# Altium PCB 3043-1-1532_Rev01.PcbDoc (part 1 of 2)
Units mm, origin at the board's own origin, x right, y up, seen from the top; angles counter-clockwise.
Board outline 98 x 98 mm, 4 copper layers (Top Layer, MidLayer1, MidLayer2, Bottom Layer); 167 components, 124 nets, 549 pads, 217 vias.
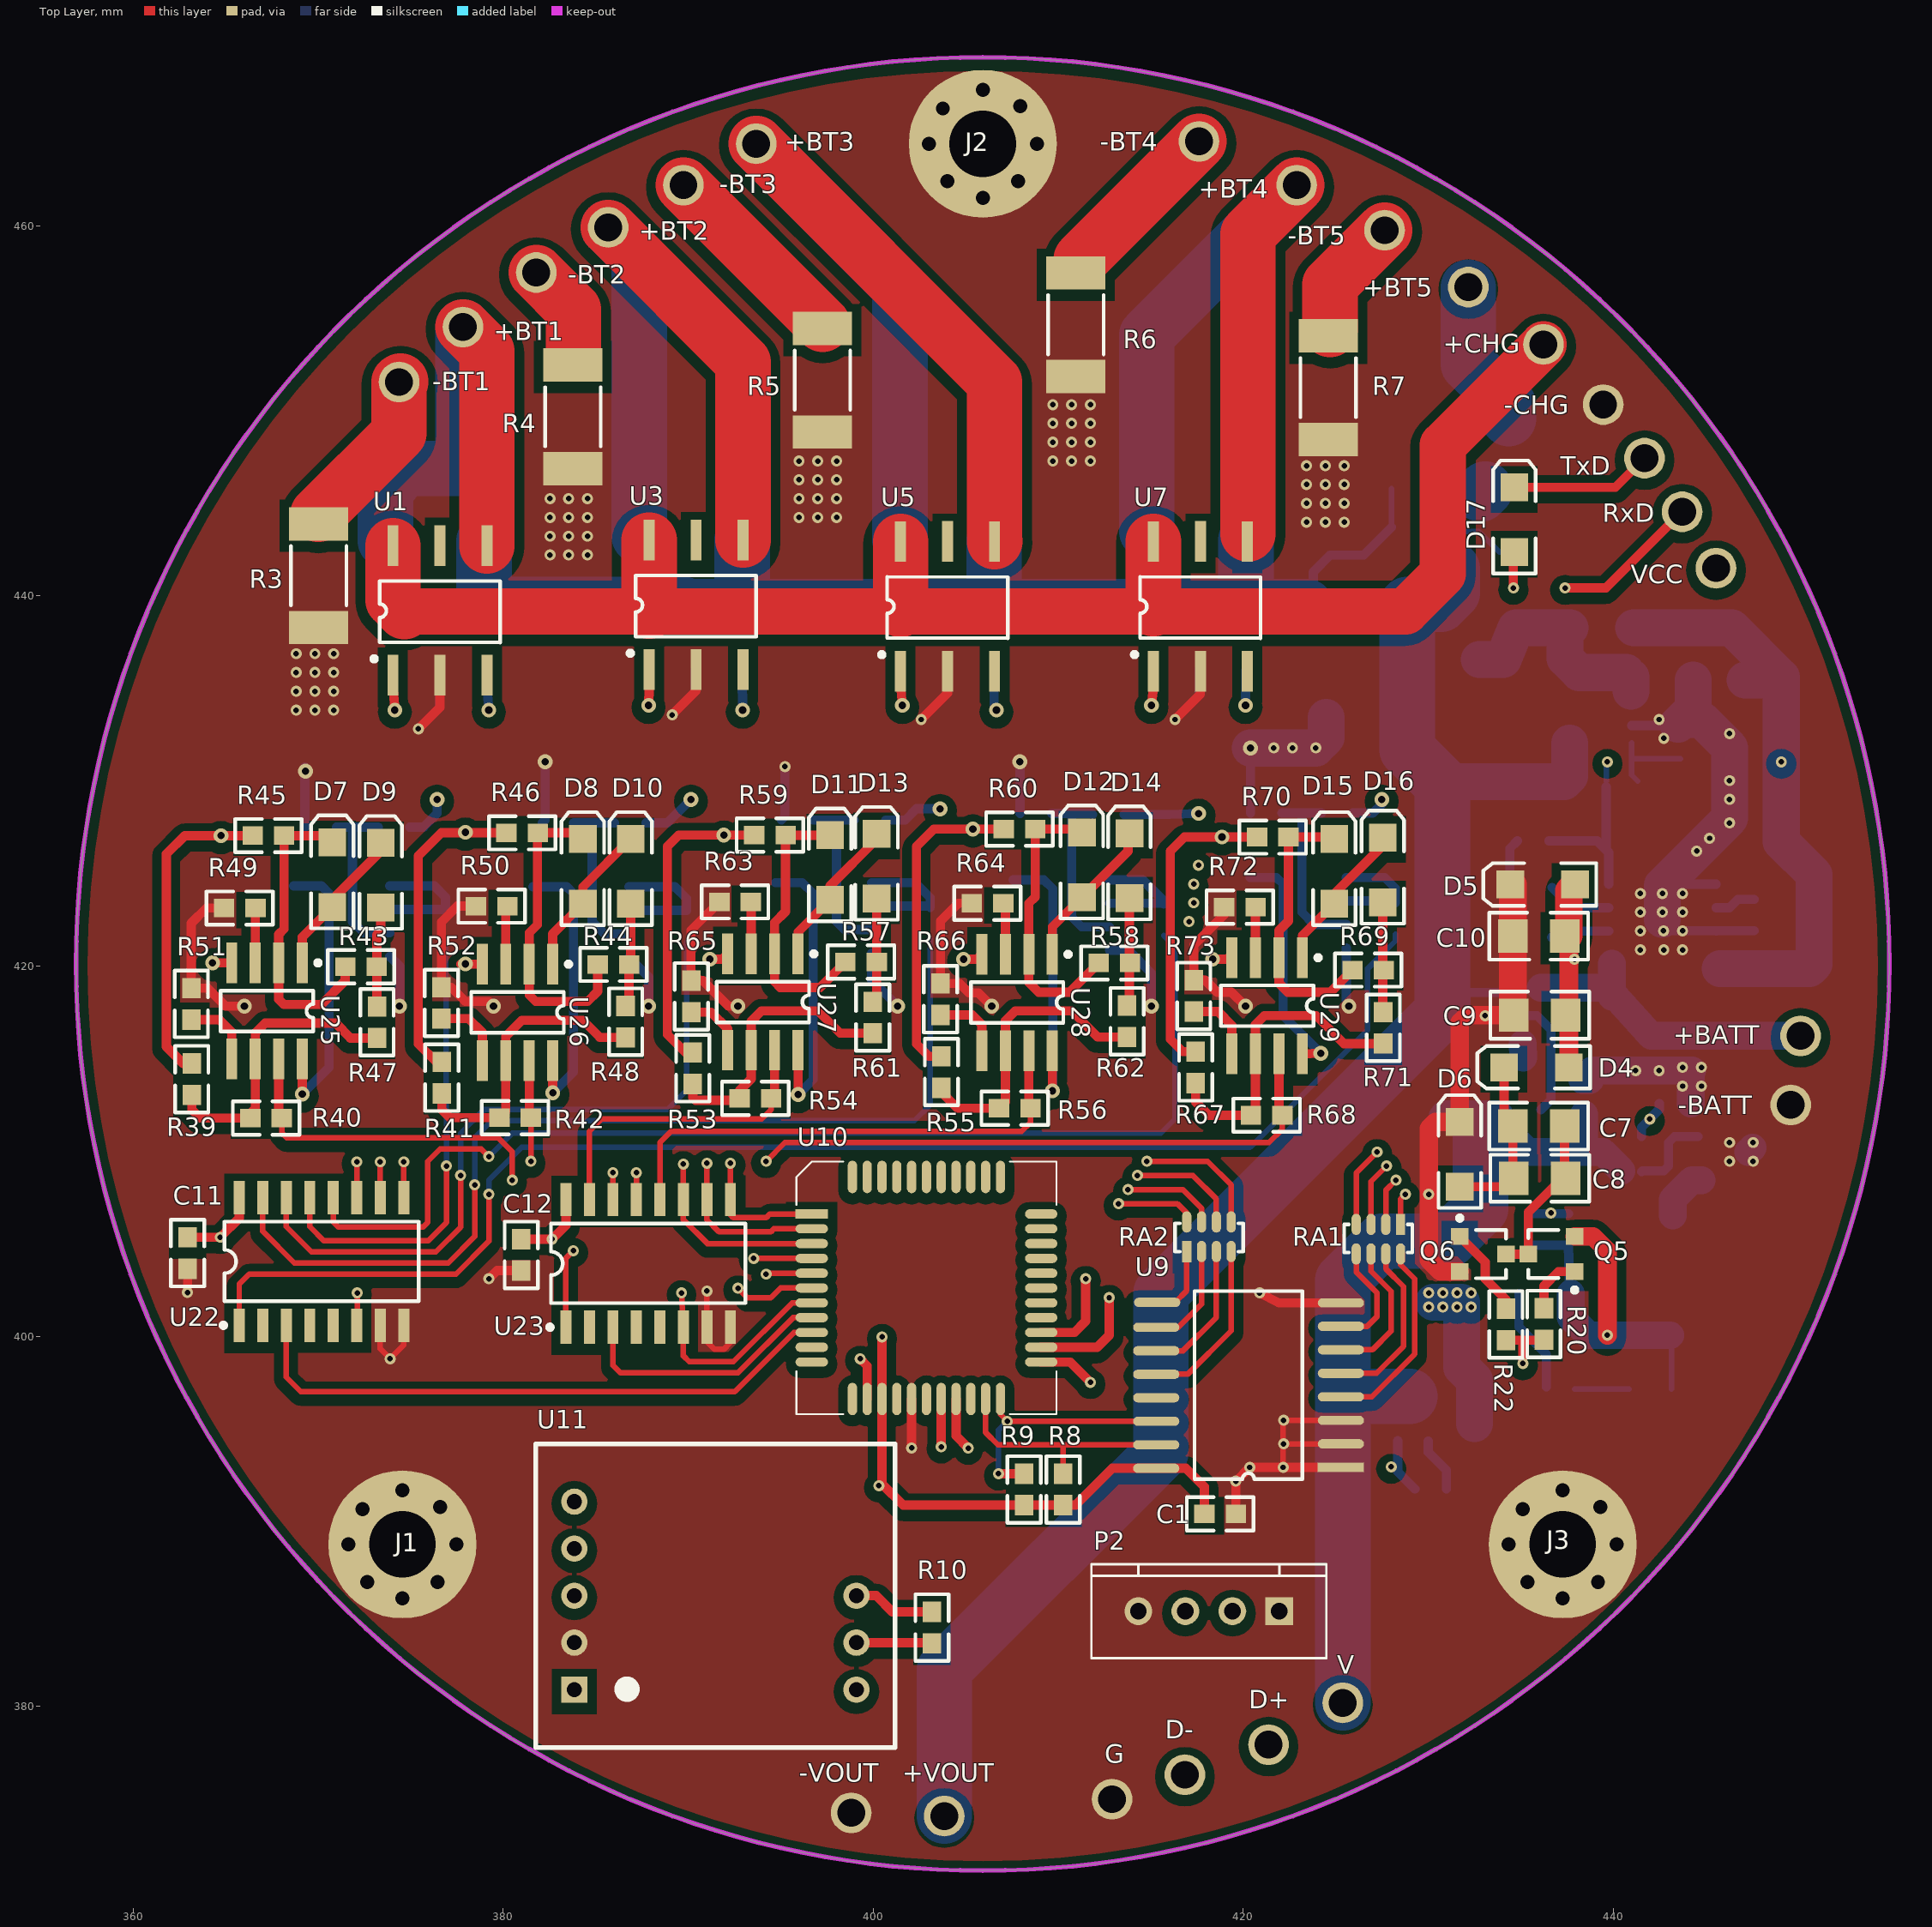
[diagram p0: Top Layer view]
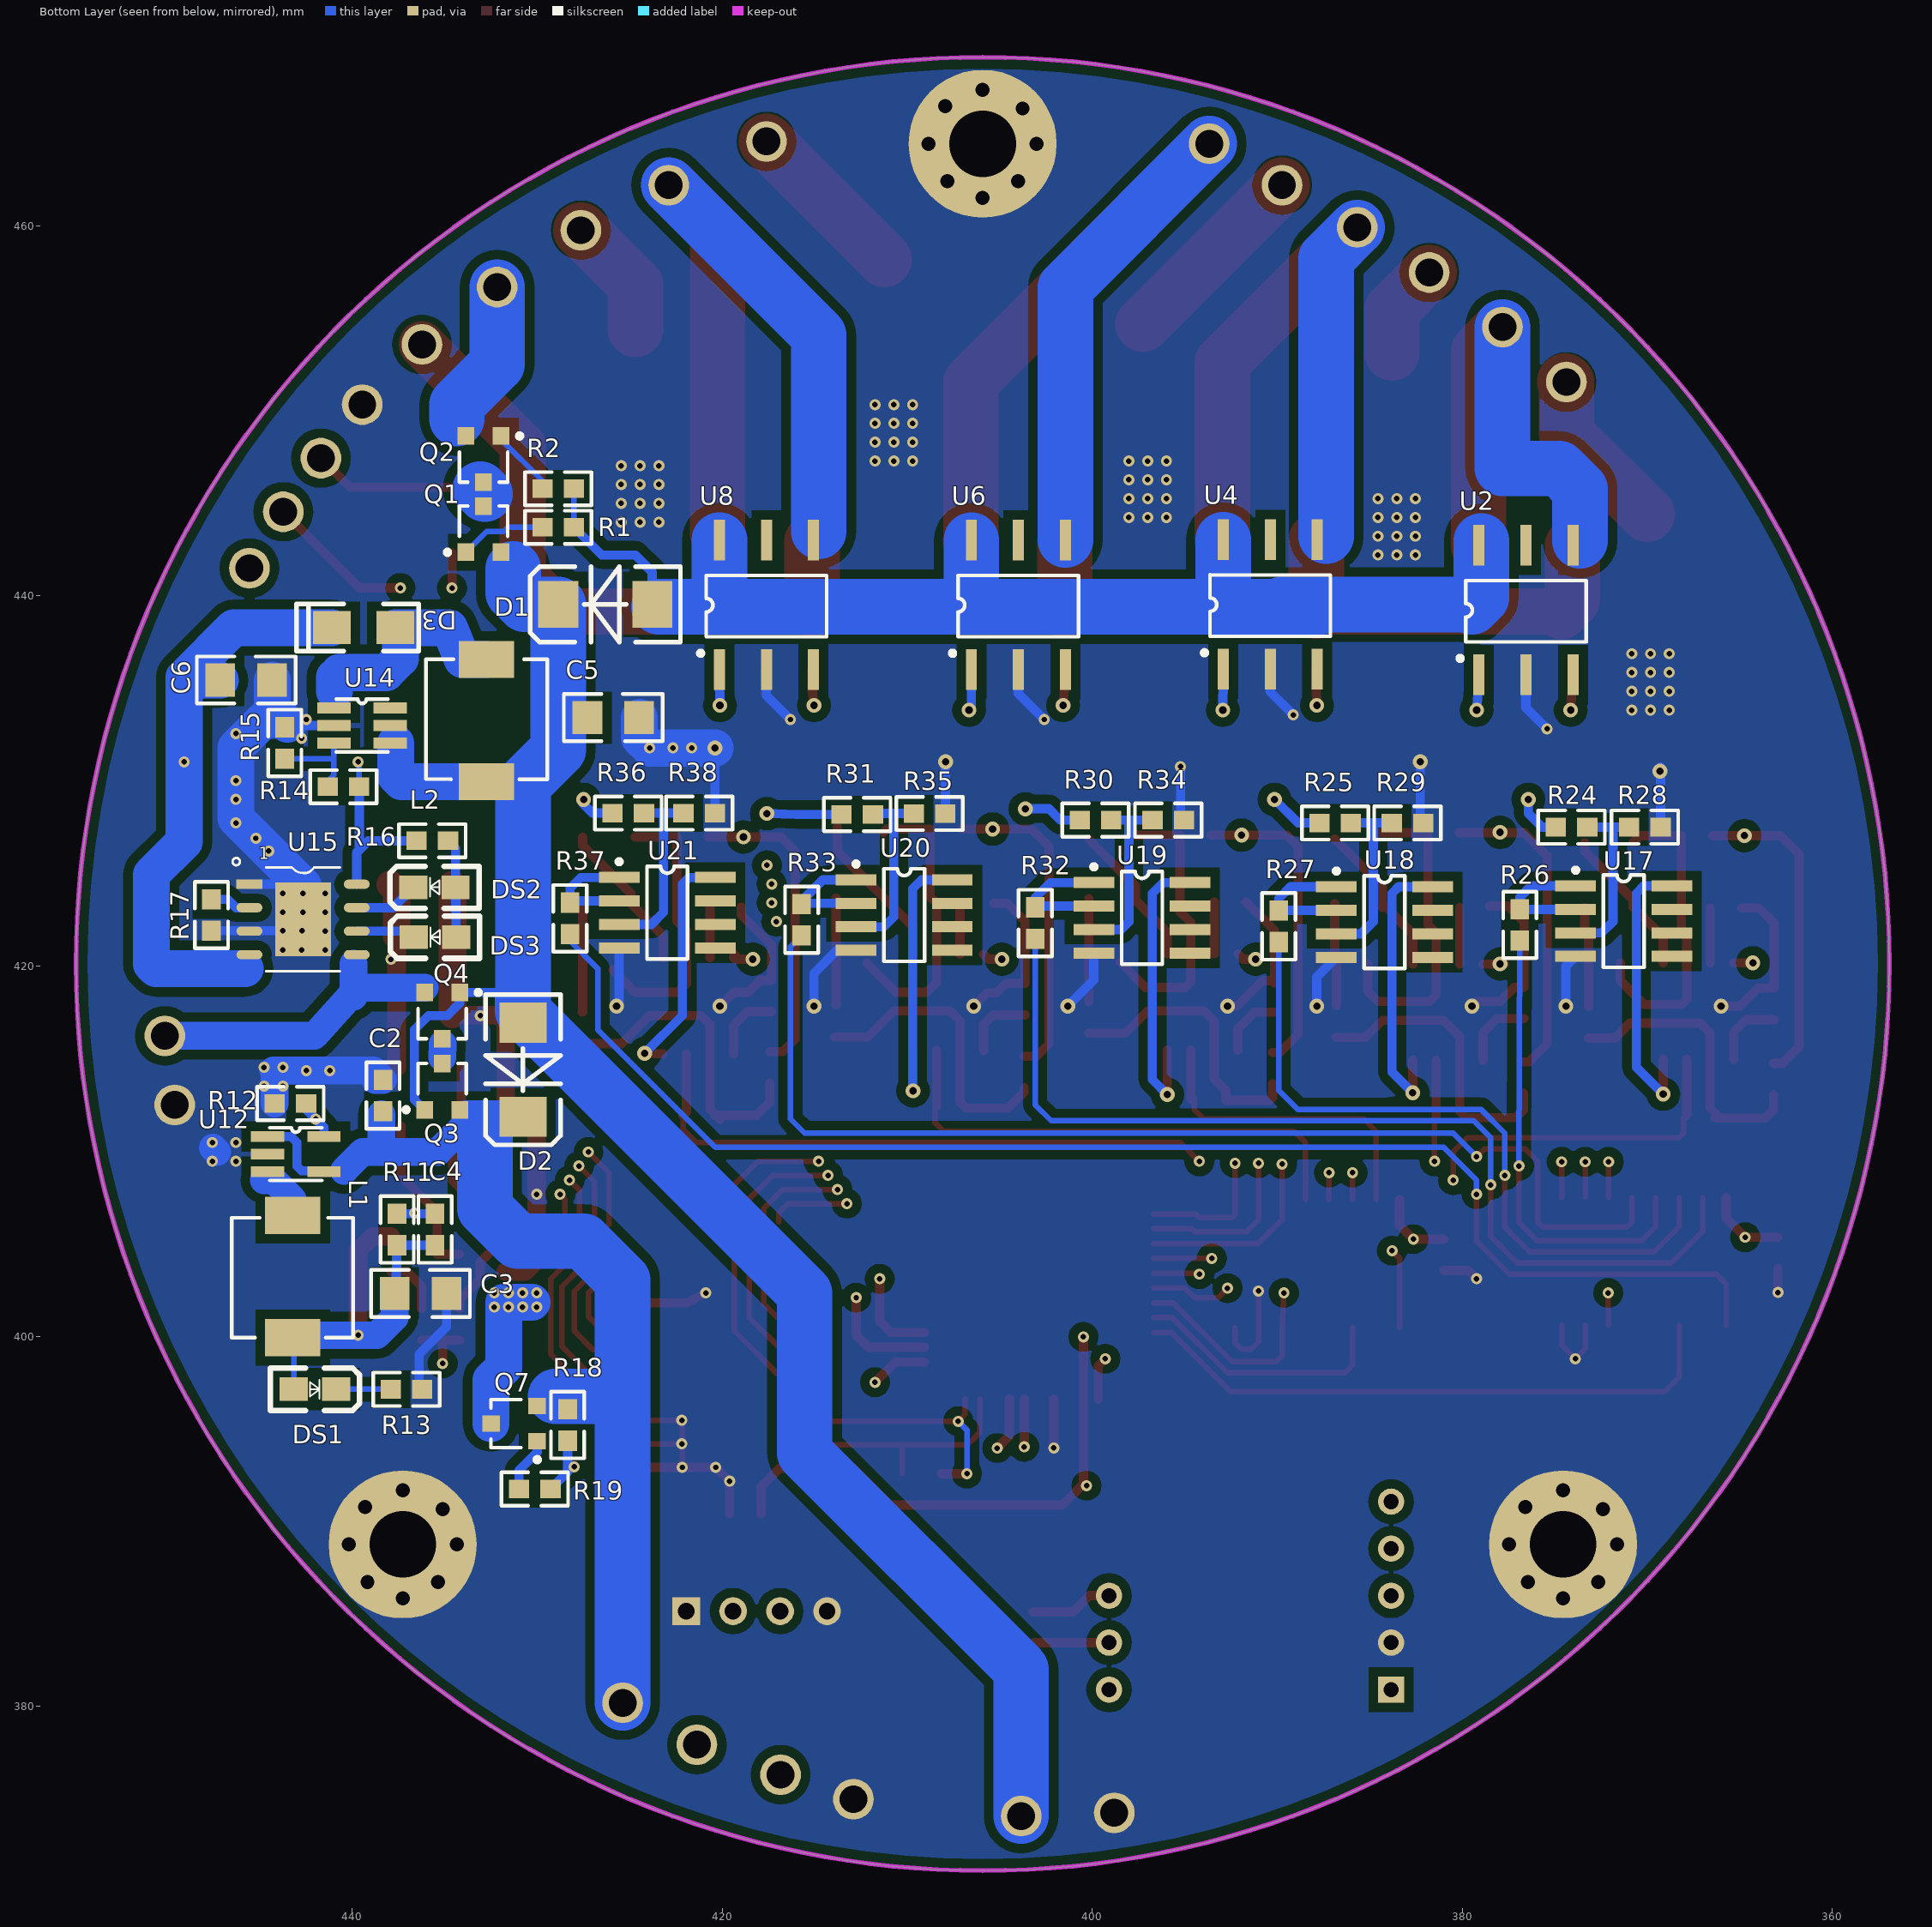
[diagram p1: Bottom Layer view, seen from below]
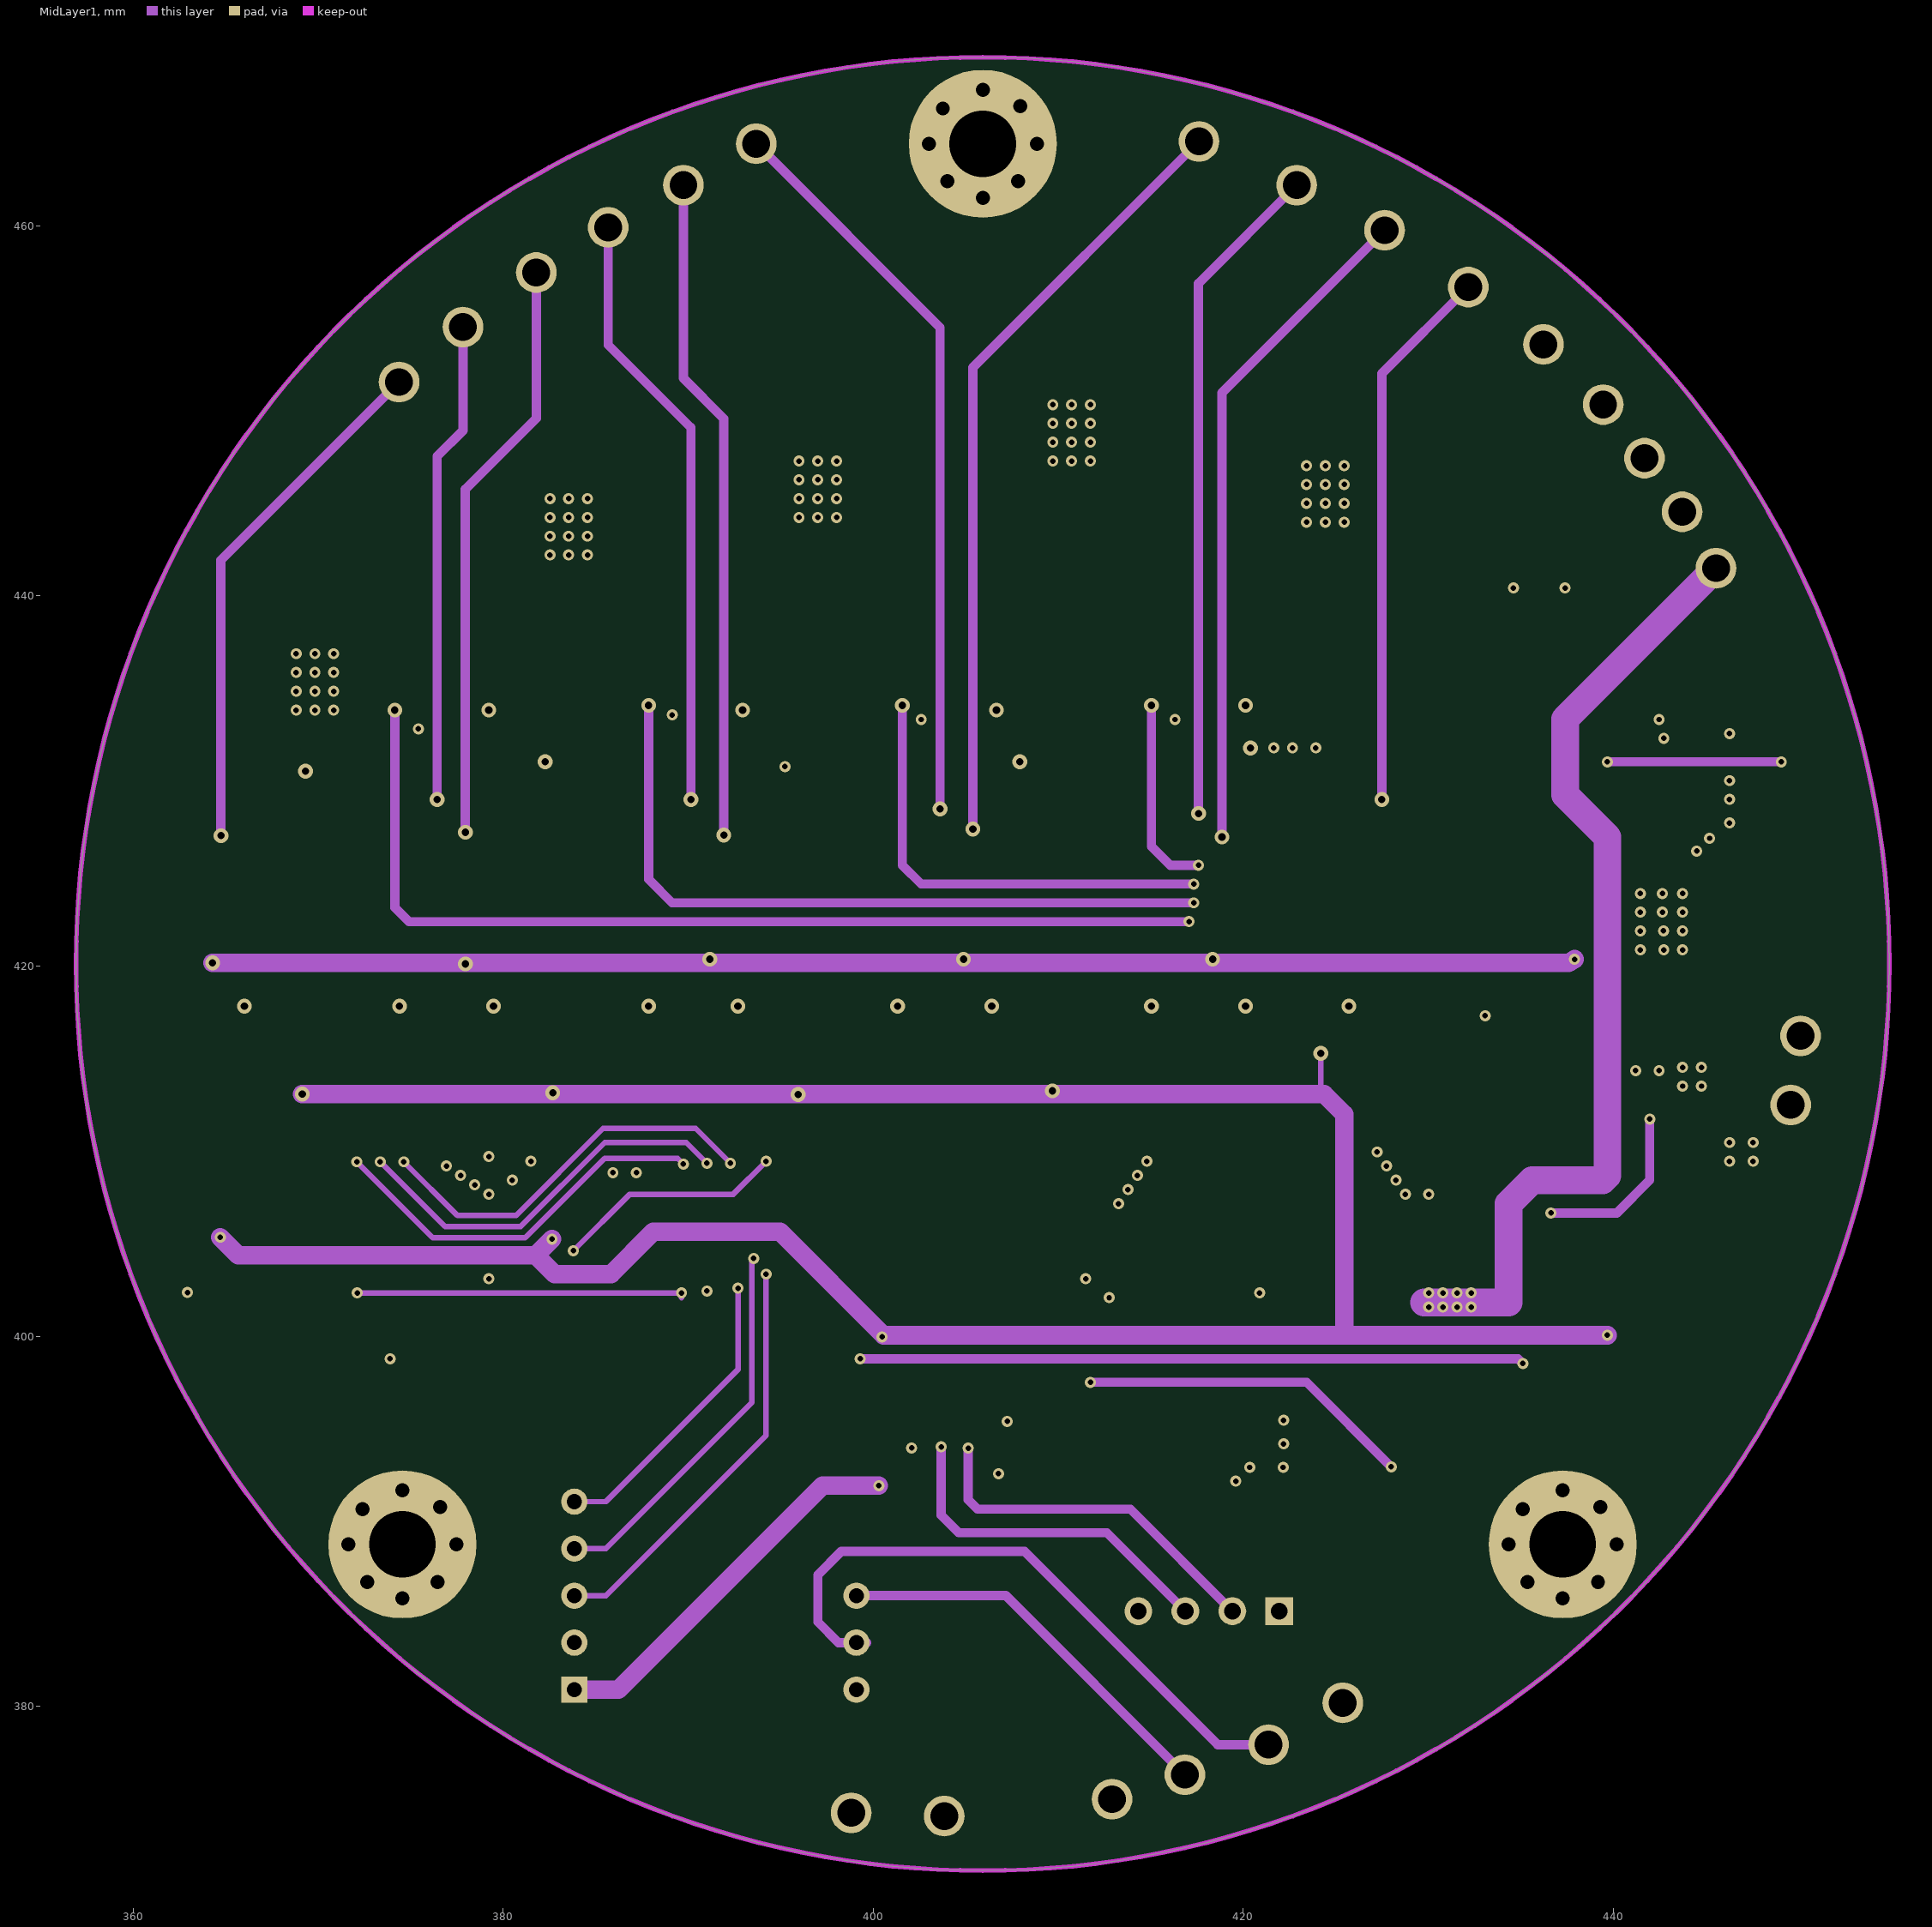
[diagram p2: MidLayer1]
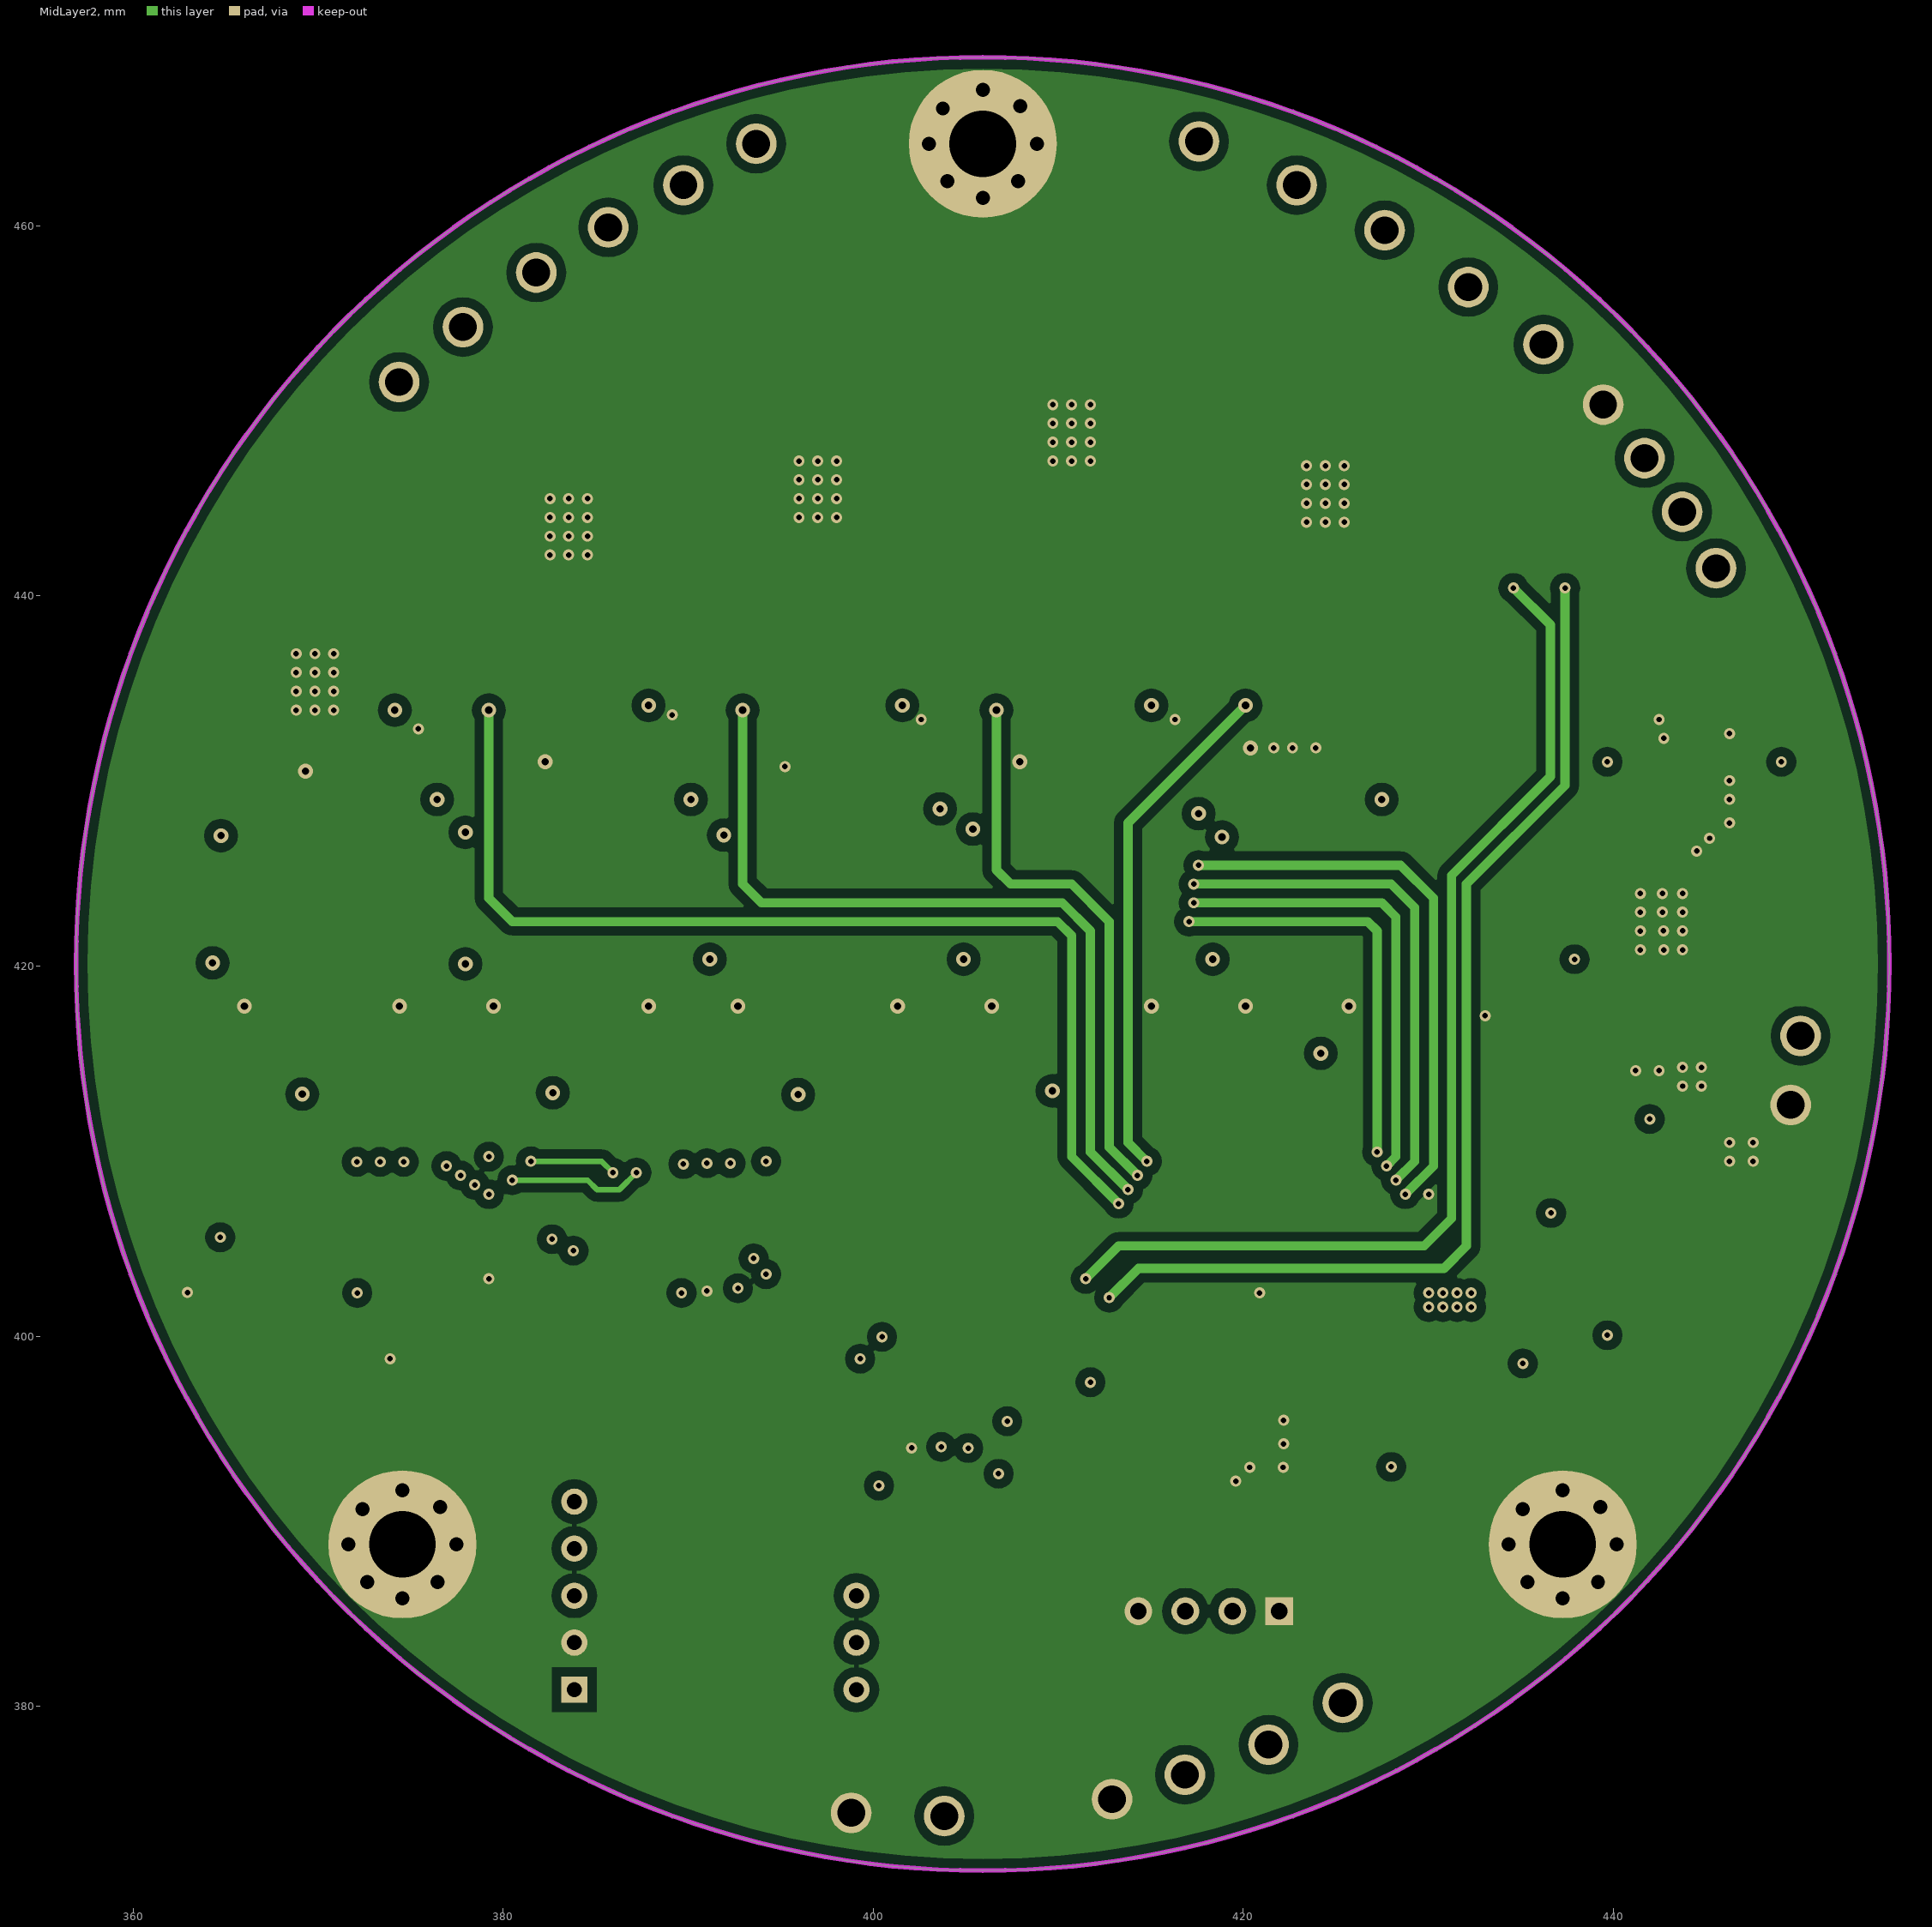
[diagram p3: MidLayer2]

## Layer stack, top to bottom
Top Layer: signal copper 0.0356
Dielectric: core 0.32, FR-4, Dk 4.8
MidLayer1: signal copper 0.0356
Dielectric: prepreg 0.32, FR-4, Dk 4.8
MidLayer2: signal copper 0.0356
Dielectric: core 0.32, FR-4, Dk 4.8
Bottom Layer: signal copper 0.0356

## Board outline
405.914,371.116 cw(c405.914,420.116) 356.914,420.116 cw(c405.914,420.116) 405.914,469.116 cw(c405.914,420.116) 454.914,420.116 cw(c405.914,420.116)

## Design rules (kind name [scope] priority, off if disabled: settings)
Clearance [All] p1: gap=0.3
ComponentClearance [All] p1: gap=0 collisioncheckmode=2
HoleSize [All] p1: absolutevalues=TRUE maxlimit=10 minlimit=0.025 maxpercent=80.000 minpercent=20.000
PolygonConnect [All] p1: connectstyle=Direct reliefconductorwidth=0.254 reliefentries=4 polygonreliefangle="90 Angle"
RoutingLayers [All] p1: top layer_v5=TRUE mid layer 1_v5=FALSE mid layer 2_v5=FALSE bottom layer_v5=TRUE
RoutingVias [All] p1: holewidth=0.711 width=1.27 viastyle="Through Hole" minholewidth=0.711 minwidth=1.27 maxholewidth=0.711 maxwidth=1.27
SolderMaskExpansion [All] p1: expansion=0.102
TestPointUsage [All] p1: valid=0 allowmultiple=FALSE
Testpoint [All] p1: side=15 testpointundercomponent=TRUE minsize=1.016 maxsize=2.54 preferedsize=1.524 minholesize=0 maxholesize=1.016 preferedholesize=0.813 testpointgrid=0.025 style=1023 order=-539222988
Width [All] p1: maxlimit=10 minlimit=0.1 preferedwidth=0.254 toplayer_prefwidth=0.5 midlayer1_prefwidth=1.5 midlayer2_prefwidth=0.5 bottomlayer_prefwidth=3 minimp=50.000000 maximp=50.000000 favimp=50.000000
15 further rules are at their usual default settings.

## Classes and differential pairs
component class U_5-PWR_ADC3: C11 C12 U22 U23
component class U_5-PWR_ADC2: R24 R25 R26 R27 R28 R29 R30 R31 R32 R33 R34 R35 R36 R37 R38 U17 U18 U19 U20 U21
component class U_5-PWR_ADC: D7 D8 D9 D10 D11 D12 D13 D14 D15 D16 R39 R40 R41 R42 R43 R44 R45 R46 R47 R48 R49 R50 R51 R52 R53 R54 R55 R56 R57 R58 R59 R60 R61 R62 R63 R64 R65 R66 R67 R68 R69 R70 R71 R72 R73 U25 U26 U27 U28 U29
component class U_2-PWR_MANAGE: +BT1 +BT2 +BT3 +BT4 +BT5 +CHG -BT1 -BT2 -BT3 -BT4 -BT5 -CHG C1 CN1 CN2 D1 DP1 Q1 Q2 R1 R2 R3 R4 R5 R6 R7 R8 R9 RA1 RA2 U1 U2 U3 U4 U5 U6 U7 U8 U9
component class U_4-PWR_MANAGE_3: +VOUT -VOUT C38 D17 D+ D- G J1 J2 J3 P2 Q7 R10 R18 R19 RxD TxD U10 U11 V VCC
component class U_3-PWR_BAK_BATT: +BATT -BATT C2 C3 C4 C5 C6 C7 C8 C9 C10 D2 D3 D4 D5 D6 DS1 DS2 DS3 L1 L2 Q3 Q4 Q5 Q6 R11 R12 R13 R14 R15 R16 R17 R20 R22 U12 U14 U15

## Components (designator, comment, footprint, x,y, rotation, side; value= is the part's Value field where it differs from the comment)
+BATT "ND" END_1.5_2.2 450.113,416.23 r90 top
+BT1 "ND" END_1.5_2.2 377.825,454.533 r90 top
+BT2 "ND" END_1.5_2.2 385.674,459.918 r90 top
+BT3 "ND" END_1.5_2.2 393.675,464.439 r90 top
+BT4 "ND" END_1.5_2.2 422.885,462.204 r90 top
+BT5 "ND" END_1.5_2.2 432.156,456.692 r90 top
+CHG "ND" END_1.5_2.2 436.22,453.593 r90 top
+VOUT "ND" END_1.5_2.2 403.835,374.066 r90 top
-BATT "ND" END_1.5_2.2 449.58,412.496 r90 top
-BT1 "ND" END_1.5_2.2 374.371,451.561 r90 top
-BT2 "ND" END_1.5_2.2 381.787,457.479 r90 top
-BT3 "ND" END_1.5_2.2 389.738,462.204 r90 top
-BT4 "ND" END_1.5_2.2 417.601,464.566 r90 top
-BT5 "ND" END_1.5_2.2 427.634,459.765 r90 top
-CHG "ND" END_1.5_2.2 439.445,450.342 r90 top
-VOUT "ND" END_1.5_2.2 398.805,374.244 r90 top
C1 "100nF_20%_0603" C1608-0603 418.744,390.398 r0 top
C2 "4.7uF_20%_0603" C1608-0603 438.328,413.004 r90 bottom
C3 "10uF_20%_1206" CC3216-1206 435.153,402.311 r180 bottom
C4 "100nF_20%_0603" C1608-0603 435.508,405.765 r90 bottom
C5 "10uF_20%_1206" CC3216-1206 424.739,433.426 r180 bottom
C6 "10uF_20%_1206" CC3216-1206 444.576,435.458 r180 bottom
C7 "10uF_20%_1206" CC3216-1206 434.873,408.534 r180 top
C8 "10uF_20%_1206" CC3216-1206 434.823,411.353 r180 top
C9 "10uF_20%_1206" CC3216-1206 434.873,417.347 r180 top
C10 "10uF_20%_1206" CC3216-1206 434.823,421.615 r180 top
C11 "100nF_20%_0603" C1608-0603 362.941,404.495 r270 top
C12 "100nF_20%_0603" C1608-0603 380.975,404.393 r270 top
D1 "D Schottky" DO-214AA_785X100_200X160A100L_P 423.85,440.385 r0 bottom
D2 "D Schottky" DO-214AA_785X100_200X160A100L_P 431.597,416.865 r270 bottom
D3 "D Schottky" DO-M7 441.122,438.277 r90 bottom
D4 "1N4148" DSO-F2/D6.1 435.839,414.528 r180 top
D5 "SMAJ5.1V" DSO-F2/D6.1 436.169,424.409 r180 top
D6 "1N4148" DSO-F2/D6.1 431.698,409.829 r90 top
D7 "1N4148" DSO-F2/D6.1 370.764,424.939 r90 top
D8 "1N4148" DSO-F2/D6.1 384.302,425.12 r90 top
D9 "1N4148" DSO-F2/D6.1 373.38,424.914 r90 top
D10 "1N4148" DSO-F2/D6.1 386.893,425.12 r90 top
D11 "1N4148" DSO-F2/D6.1 397.662,425.323 r90 top
D12 "1N4148" DSO-F2/D6.1 411.277,425.475 r90 top
D13 "1N4148" DSO-F2/D6.1 400.177,425.399 r90 top
D14 "1N4148" DSO-F2/D6.1 413.842,425.425 r90 top
D15 "1N4148" DSO-F2/D6.1 424.917,425.12 r90 top
D16 "1N4148" DSO-F2/D6.1 427.533,425.196 r90 top
D17 "1N4148" DSO-F2/D6.1 434.645,444.119 r90 top
D+ "ND" END_1.5_2.2 421.361,377.927 r0 top
D- "ND" END_1.5_2.2 416.839,376.301 r0 top
DS1 "LED" LED0805 441.884,397.129 r0 bottom
DS2 "LED" LED0805 435.661,424.256 r180 bottom
DS3 "LED" LED0805 435.635,421.564 r180 bottom
G "ND" END_1.5_2.2 412.902,374.98 r90 top
J1 "COAX-F" PAD_GND 376.961,386.08 r0 top
J2 "COAX-F" PAD_GND 408.33,461.772 r0 top
J3 "COAX-F" PAD_GND 439.674,386.08 r0 top
L1 "Inductor" L6x6x3_3A 444.475,403.987 r270 bottom
L2 "Inductor" L6x6x3_3A 431.47,432.511 r90 bottom
P2 "Header 4" XH-04H 421.945,385.14 r180 top
Q1 "MOSFET-P  SI3401" SO-G3/C2.5 432.841,444.525 r180 bottom
Q2 "MOSFET-P  SI3401" SO-G3/C2.5 432.943,446.481 r0 bottom
Q3 "MOSFET-P  SI2301" SO-G3/C2.5 435.077,414.401 r180 bottom
Q4 "MOSFET-P  SI2301" SO-G3/C2.5 435.178,416.408 r0 bottom
Q5 "SS8550" SO-G3/C2.5 435.737,404.495 r90 top
Q6 "J3Y_SS8050 SMD0805" SO-G3/C2.5 433.857,404.381 r270 top
Q7 "MOSFET-P  SI2301" SO-G3/C2.5 432.156,395.326 r90 bottom
R1 "Res3" C1608-0603 428.854,443.713 r180 bottom
R2 "Res3" C1608-0603 428.854,445.795 r180 bottom
R3 "25mR_1%_3225" CR6332-2512 370.027,441.096 r270 top
R4 "25mR_1%_3225" CR6332-2512 383.769,449.682 r270 top
R5 "25mR_1%_3225" CR6332-2512 397.256,451.663 r270 top
R6 "25mR_1%_3225" CR6332-2512 410.947,454.66 r270 top
R7 "25mR_1%_3225" CR6332-2512 424.586,451.256 r270 top
R8 "4.7K_5%_0603" C1608-0603 410.261,391.719 r90 top
R9 "4.7K_5%_0603" C1608-0603 408.153,391.719 r90 top
R10 "Res3" C1608-0603 403.174,384.251 r270 top
R11 "225K_1%_0603" C1608-0603 437.566,405.765 r90 bottom
R12 "50K_1%_0603" C1608-0603 443.332,412.572 r0 bottom
R13 "Res3" C1608-0603 437.058,397.129 r0 bottom
R14 "2.2K_5%_0603" C1608-0603 440.461,429.692 r0 bottom
R15 "2.2K_5%_0603" C1608-0603 443.636,432.054 r90 bottom
R16 "1K_5%_0603" C1608-0603 435.661,426.771 r180 bottom
R17 "2.2K_5%_0603" C1608-0603 447.599,422.758 r270 bottom
R18 "10K_5%_0603" C1608-0603 428.346,395.199 r270 bottom
R19 "10K_5%_0603" C1608-0603 430.124,391.744 r180 bottom
R20 "10K_5%_0603" C1608-0603 436.245,400.66 r270 top
R22 "10K_0.1%_0603" C1608-0603 434.188,400.634 r270 top
R24 "10K_5%_0603" C1608-0603 374.091,427.507 r0 bottom
R25 "10K_5%_0603" C1608-0603 386.867,427.736 r0 bottom
R26 "10K_5%_0603" C1608-0603 376.885,422.224 r270 bottom
R27 "10K_5%_0603" C1608-0603 389.915,422.148 r270 bottom
R28 "10K_5%_0603" C1608-0603 370.129,427.507 r0 bottom
R29 "10K_5%_0603" C1608-0603 382.956,427.736 r0 bottom
R30 "10K_5%_0603" C1608-0603 399.821,427.888 r0 bottom
R31 "10K_5%_0603" C1608-0603 412.699,428.193 r0 bottom
R32 "10K_5%_0603" C1608-0603 403.073,422.326 r270 bottom
R33 "10K_5%_0603" C1608-0603 415.696,422.504 r270 bottom
R34 "10K_5%_0603" C1608-0603 395.884,427.888 r0 bottom
R35 "10K_5%_0603" C1608-0603 408.788,428.244 r0 bottom
R36 "10K_5%_0603" C1608-0603 425.069,428.269 r0 bottom
R37 "10K_5%_0603" C1608-0603 428.219,422.58 r270 bottom
R38 "10K_5%_0603" C1608-0603 421.234,428.269 r0 bottom
R39 "20K_5%_0603" C1608-0603 363.169,413.89 r90 top
R40 "200K_5%_0603" C1608-0603 367.182,411.782 r180 top
R41 "20K_5%_0603" C1608-0603 376.682,413.969 r90 top
R42 "200K_5%_0603" C1608-0603 380.644,411.81 r180 top
R43 "20K_5%_0603" C1608-0603 372.313,419.964 r180 top
R44 "20K_5%_0603" C1608-0603 385.953,420.091 r180 top
R45 "20K_5%_0603" C1608-0603 367.309,427.048 r180 top
R46 "20K_5%_0603" C1608-0603 381.025,427.203 r180 top
R47 "10K_5%_0603" C1608-0603 373.177,416.964 r90 top
R48 "10K_5%_0603" C1608-0603 386.613,416.992 r90 top
R49 "10K_5%_0603" C1608-0603 365.76,423.136 r180 top
R50 "10K_5%_0603" C1608-0603 379.374,423.24 r180 top
R51 "10K_5%_0603" C1608-0603 363.144,417.954 r90 top
R52 "10K_5%_0603" C1608-0603 376.657,418.008 r90 top
R53 "20K_5%_0603" C1608-0603 390.246,414.477 r90 top
R54 "200K_5%_0603" C1608-0603 393.624,412.852 r180 top
R55 "20K_5%_0603" C1608-0603 403.682,414.274 r90 top
R56 "200K_5%_0603" C1608-0603 407.645,412.318 r180 top
R57 "20K_5%_0603" C1608-0603 399.339,420.218 r180 top
R58 "20K_5%_0603" C1608-0603 413.029,420.167 r180 top
R59 "20K_5%_0603" C1608-0603 394.411,427.076 r180 top
R60 "20K_5%_0603" C1608-0603 407.899,427.406 r180 top
R61 "10K_5%_0603" C1608-0603 399.974,417.22 r90 top
R62 "10K_5%_0603" C1608-0603 413.715,417.017 r90 top
R63 "10K_5%_0603" C1608-0603 392.532,423.469 r180 top
R64 "10K_5%_0603" C1608-0603 406.171,423.393 r180 top
R65 "10K_5%_0603" C1608-0603 390.169,418.363 r90 top
R66 "10K_5%_0603" C1608-0603 403.631,418.211 r90 top
R67 "20K_5%_0603" C1608-0603 417.424,414.528 r90 top
R68 "200K_5%_0603" C1608-0603 421.259,411.937 r180 top
R69 "20K_5%_0603" C1608-0603 426.745,419.786 r180 top
R70 "20K_5%_0603" C1608-0603 421.589,426.974 r180 top
R71 "10K_5%_0603" C1608-0603 427.558,416.662 r90 top
R72 "10K_5%_0603" C1608-0603 419.811,423.189 r180 top
R73 "10K_5%_0603" C1608-0603 417.322,418.389 r90 top
RA1 "1K_5% 1206-0603" RCA-4 428.498,406.044 r270 top
RA2 "1K_5% 1206-0603" RCA-4 416.941,404.571 r90 top
RxD "ND" END_1.5_2.2 443.713,444.551 r0 top
TxD "ND" END_1.5_2.2 441.681,447.446 r0 top
U1 "TLP3107" SO-6_P2.54_B7 381.66,435.712 r90 top
U2 "TLP3107" SO-6_P2.54_B7 371.475,435.737 r90 bottom
U3 "TLP3107" SO-6_P2.54_B7 395.503,436.016 r90 top
U4 "TLP3107" SO-6_P2.54_B7 385.293,436.042 r90 bottom
U5 "TLP3107" SO-6_P2.54_B7 409.092,435.94 r90 top
U6 "TLP3107" SO-6_P2.54_B7 398.907,436.016 r90 bottom
U7 "TLP3107" SO-6_P2.54_B7 422.758,435.94 r90 top
U8 "TLP3107" SO-6_P2.54_B7 412.521,436.016 r90 bottom
U9 "PCF8574T" SOP16_P1.27_B10 422.783,395.402 r180 top
U10 "STC15F2K60S2_QFP44" PQFP44 396.672,406.603 r0 top
U11 "RSM3485S_CTM8251T" RSM485 394.132,380.949 r270 top
U12 "AP2406/AP2408-ADJ" SOT23-5 442.9,408.635 r180 bottom
U14 "AP2004" SOT23-6 439.318,431.8 r180 bottom
U15 "AP5057" SON8-6_2-1_27 445.567,421.869 r180 bottom
U17 "LM358D" 751-02 371.272,422.429 r270 bottom
U18 "LM358D" 751-02 384.2,422.377 r270 bottom
U19 "LM358D" 751-02 397.307,422.605 r270 bottom
U20 "LM358D" 751-02 410.159,422.758 r270 bottom
U21 "LM358D" 751-02 422.961,422.885 r270 bottom
U22 "MC14051BF" 966-01 370.18,404.038 r0 top
U23 "MC14051BF" 966-01 387.833,403.936 r0 top
U25 "LM358D" 751-02 367.233,417.573 r180 top
U26 "LM358D" 751-02 380.771,417.5 r180 top
U27 "LM358D" 751-02 394.03,418.059 r180 top
U28 "LM358D" 751-02 407.772,418.033 r180 top
U29 "LM358D" 751-02 421.284,417.855 r180 top
V "ND" END_1.5_2.2 425.374,380.187 r90 top
VCC "ND" END_1.5_2.2 445.541,441.503 r0 top

## Footprints (in the part's own frame and the unit in brackets; to place one, negate y for a bottom-side part, rotate by r counter-clockwise, add the part's x,y. Pads: shape width x height; smd on the part's side, far side on the other; paste and mask are expansions set on the pad)
751-02 [mm] "Small Outline; 8 Leads; Body Width 3.9 mm; Pitch 1.27 mm"
  rect 0.6x2.2 smd: 1(-1.905,-2.6) 2(-0.635,-2.6) 3(0.635,-2.6) 4(1.905,-2.6) 5(1.905,2.6) 6(0.635,2.6) 7(-0.635,2.6) 8(-1.905,2.6)
  silkscreen extent -2.88,-2.72 2.5,1.1
966-01 [mm] "Small Outline; 16 Leads; Body Width 5.3 mm; Pitch 1.27 mm"
  rect 0.6x1.8 smd: 1(-4.445,-3.45) 2(-3.175,-3.45) 3(-1.905,-3.45) 4(-0.635,-3.45) 5(0.635,-3.45) 6(1.905,-3.45) 7(3.175,-3.45) 8(4.445,-3.45) 9(4.445,3.45) 10(3.175,3.45) 11(1.905,3.45) 12(0.635,3.45) 13(-0.635,3.45) 14(-1.905,3.45) 15(-3.175,3.45) 16(-4.445,3.45)
  silkscreen extent -5.43,-3.57 5.25,2.15
C1608-0603 [mm] "Chip Resistor; Body 1.6 x 0.8 mm (LxW typ)"
  rect 1.1x1 smd: 1(-0.85,0) 2(0.85,0)
  silkscreen extent -1.8,-0.9 1.8,0.9
CC3216-1206 [mm]
  rect 1.6x1.8 smd: 1(-2.54,0) 2(0.26,0)
  silkscreen extent -3.81,-1.27 1.52,1.27
CR6332-2512 [mm] "Chip Resistor; Body 6.3 x 3.2 mm (LxW typ)"
  rect 1.8x3.2 smd: 1(-2.8,0) 2(2.8,0)
  silkscreen extent -1.6,-1.5 1.6,1.5
DO-214AA_785X100_200X160A100L_P [mil]
  rect 85x100 smd: 1(-3,33) 2(197,33)
  silkscreen extent -63,-47 257,113
DO-M7 [mil]
  rect 70x80 smd: 1(0.43,-136.45) 2(0.43,-1.45)
  silkscreen extent -50,-186 50,74
DSO-F2/D6.1 [mm] "SMT LED; 2 Flat Leads"
  rect 1.5x1.5 smd: 1(-1.75,0) 2(1.75,0)
  silkscreen extent -2.9,-1.15 3.2,1.15
END_1.5_2.2 [mm]
  round 2.2 hole 1.5: 1(0,0)
L6x6x3_3A [mm]
  rect 2x3 smd: 1(-2.54,1.27) 2(4.064,1.27)
  silkscreen extent -2.41,-2.03 4.06,4.53
LED0805 [mil]
  rect 60x50 smd: 1(49.55,-0.2) 2(-40.45,-0.2)
  silkscreen extent -90,-45 100,45
PAD_GND [mil]
  round 60 hole 30: 1(-210.02,105) 1(-180.02,180) 1(-170.02,25) 1(-95.02,-10) 1(-95.02,220) 1(-20.02,25) 1(-15.02,185) 1(19.98,105)
  round 314.96 hole 141.73: 1(-95.02,105)
PQFP44 [mm]
  rect 1.75x0.5 smd: 1(0,0)
  oval 1.75x0.5 smd: 2(0,-0.8) 3(0,-1.6) 4(0,-2.4) 5(0,-3.2) 6(0,-4) 7(0,-4.8) 8(0,-5.6) 9(0,-6.4) 10(0,-7.2) 11(0,-8) 23(12.4,-8) 24(12.4,-7.2) 25(12.4,-6.4) 26(12.4,-5.6) 27(12.4,-4.8) 28(12.4,-4) 29(12.4,-3.2) 30(12.4,-2.4) 31(12.4,-1.6) 32(12.4,-0.8) 33(12.4,0)
  oval 0.5x1.75 smd: 12(2.2,-10) 13(3,-10) 14(3.8,-10) 15(4.6,-10) 16(5.4,-10) 17(6.2,-10) 18(7,-10) 19(7.8,-10) 20(8.6,-10) 21(9.4,-10) 22(10.2,-10) 34(10.2,2) 35(9.4,2) 36(8.6,2) 37(7.8,2) 38(7,2) 39(6.2,2) 40(5.4,2) 41(4.6,2) 42(3.8,2) 43(3,2) 44(2.2,2)
  silkscreen extent -0.82,-10.83 13.23,2.83
RCA-4 [mm]
  rect 1.146x0.5 smd: 1(0,0)
  oval 1.146x0.5 smd: 2(0,-0.8) 3(0,-1.6) 4(0,-2.4) 5(1.6,-2.4) 6(1.6,-1.6) 7(1.6,-0.8) 8(1.6,0)
  silkscreen extent 0,-3.05 1.52,0.64
RSM485 [mil]
  rect 56x56 hole 32: 1(2,-405)
  round 56 hole 32: 2(-98,-405) 3(-198,-405) 4(-298,-405) 5(-398,-405) 8(-198,195) 9(-98,195) 10(2,195)
  silkscreen extent -521,-487 125,277
SO-6_P2.54_B7 [mm] "Surface Mount,Pitch=2.54mm,Body=7mm"
  rect 2.2x0.6 smd: 1(0,7.62) 2(0,5.08) 3(0,2.54) 4(7,2.54) 5(7.01,5.08) 6(7,7.62)
  silkscreen extent 0.77,1.83 5.1,8.76
SO-G3/C2.5 [mm] "SOT-23; 3 Leads; Body 3.0 x 2.6 mm, inc. leads (LxW max)"
  rect 0.9x0.95 smd: 1(-1.001,-2.164) 2(0.899,-2.164) 3(-0.051,0.336)
  silkscreen extent -2.13,-2.29 1.25,0.34
SON8-6_2-1_27 [mm]
  rect 1.4x0.5 smd: 1(0.021,2.559)
  oval 1.4x0.5 smd: 2(0.021,1.289) 3(0.021,0.019) 4(0.021,-1.251) 5(5.821,-1.251) 6(5.821,0.019) 7(5.821,1.289) 8(5.821,2.559)
  rect 3x4 smd: 9(2.921,0.654)
  silkscreen extent -0.89,-2.15 4.92,3.98
SOP16_P1.27_B10 [mm]
  rect 2.5x0.5 smd: 1(-2.489,2.489)
  oval 2.5x0.5 smd: 2(-2.489,1.219) 3(-2.489,-0.051) 4(-2.489,-1.321) 5(-2.489,-2.591) 6(-2.489,-3.861) 7(-2.489,-5.131) 8(-2.489,-6.401) 9(7.442,-6.426) 10(7.493,-5.08) 11(7.493,-3.81) 12(7.493,-2.54) 13(7.493,-1.27) 14(7.493,0) 15(7.493,1.27) 16(7.493,2.54)
  silkscreen extent -0.4,-7.04 5.43,3.12
SOT23-5 [mm]
  rect 1.8x0.6 smd: 1(-1.662,2.154) 2(-1.662,1.204) 3(-1.662,0.254) 4(1.386,0.254) 5(1.386,2.154)
  silkscreen extent -1.54,-0.22 1.26,2.63
SOT23-6 [mm]
  rect 1.8x0.6 smd: 1(-1.662,2.154) 2(-1.662,1.204) 3(-1.662,0.254) 4(1.386,0.254) 5(1.386,1.204) 6(1.386,2.154)
  silkscreen extent -1.54,-0.22 1.26,2.63
XH-04H [mm] "XH Serial,2.54mm pitch"
  rect 1.5x1.5 hole 0.9: 1(0,0)
  round 1.5 hole 0.9: 2(2.54,0) 3(5.08,0) 4(7.62,0)
  silkscreen extent -2.54,-2.54 10.16,2.54

## Part data
C1 C2 C3 C4 C5 C6 C7 C8 C9 C10 C11 C12: library part Cap2, "Capacitor"
D1 D2 D3: "Schottky Diode"
D4 D5 D6 D7 D8 D9 D10 D11 D12 D13 D14 D15 D16 D17: library part "D Tunnel1", "Tunnel Diode - RLC Model"
J1 J2 J3: "Coax-F Connector"
P2: "Header, 4-Pin"
Q1 Q2 Q3 Q4 Q7: library part MOSFET-P, "P-Channel MOSFET"
Q5: library part 2N3906, "PNP General Purpose Amplifier"
Q6: library part QNPN, "NPN Bipolar Transistor"
R1 R2 R10 R13: "Resistor"
R3 R4 R5 R6 R7 R8 R9 R11 R12 R14 R15 R16 R17 R18 R19 R20 R22 R24 R25 R26 R27 R28 R29 R30 R31 R32 R33 R34 R35 R36 R37 R38 R39 R40 R41 R42 R43 R44 R45 R46 R47 R48 R49 R50 R51 R52 R53 R54 R55 R56 R57 R58 R59 R60 R61 R62 R63 R64 R65 R66 R67 R68 R69 R70 R71 R72 R73: library part Res3, "Resistor"
RA1 RA2: library part RESPACK1X4
U11: library part RSM485S_CTM8251T, "RSM485S_CTM8251T"
U12: library part AP2406
U14: library part MP3301
U15: library part LM358D, "Dual Low-Power Operational Amplifier"
U17 U18 U19 U20 U21 U25 U26 U27 U28 U29: "Dual Low-Power Operational Amplifier"
U22 U23: "8-Channel Analog Multiplexer/Demultiplexer"

## Via types
v1: diameter 0.6, hole 0.3, Top Layer to Bottom Layer, 175 vias
v2: diameter 0.8, hole 0.4, Top Layer to Bottom Layer, 42 vias

## Nets (pads, with @x,y where several pads share a name; then routed paths per layer and width w, separated by ;. In a path a pad name is that pad's centre, name@x,y a point inside that pad or via, vN(x,y) a via of type N, cw(c..) or ccw(c..) an arc to the next point about the centre after c; other vN are vias at no path point)
485A: D+.1 R10.2 U11.9 | length 38.9
  Top Layer w0.5: U11.9@399.085,383.438 R10.2@403.137,383.438
  MidLayer1 w0.5: U11.9@399.644,383.438 398.12,383.438 397.002,384.556 397.002,387.096 398.272,388.366 408.178,388.366 418.617,377.927 D+.1@421.361,377.927
485B: D-.1 R10.1 U11.8 | length 26.6
  Top Layer w0.5: U11.8@399.085,385.978 400.152,385.978 401.029,385.101 R10.1@403.174,385.101
  MidLayer1 w0.5: U11.8@399.085,385.978 407.162,385.978 D-.1@416.839,376.301
  Bottom Layer w0.5: U11.8@398.678,385.978 U11.8@399.085,385.978
BC1: R40.1 U23.13 U25.7 | length 27
  Top Layer w0.3: R40.1@368.032,411.782 368.032,410.986 368.3,410.718 379.73,410.718 380.492,409.956 v1(380.492,408.432) ; U23.13@387.198,407.386 v1(387.198,408.838)
  Top Layer w0.5: R40.1@367.868,411.946 U25.7@367.868,414.973
  MidLayer2 w0.3: v1(380.492,408.432) 384.556,408.432 385.064,407.924 386.283,407.924 v1(387.198,408.838)
BC2: R42.1 U23.14 U26.7 | length 11.6
  Top Layer w0.3: v1(381.494,409.448) R42.1@381.494,411.81 ; U23.14@385.928,407.386 v1(385.928,408.838)
  Top Layer w0.5: R42.1@381.406,411.836 U26.7@381.406,414.9
  MidLayer2 w0.3: v1(381.494,409.448) 385.318,409.448 v1(385.928,408.838)
BC3: R54.1 U23.15 U27.7 | length 17.2
  Top Layer w0.3: U23.15@384.658,407.386 384.658,411.074 385.318,411.734 393.966,411.734 394.474,412.242 R54.1@394.474,412.852
  Top Layer w0.5: R54.1@394.665,412.813 U27.7@394.665,415.459
BC4: R56.1 U23.12 U28.7 | length 27.4
  Top Layer w0.3: U23.12@388.468,407.386 388.468,410.464 389.068,411.064 408.016,411.064 408.495,411.543 R56.1@408.495,412.318
  Top Layer w0.5: R56.1@408.407,412.406 U28.7@408.407,415.433
BC5: R68.1 U23.1 U29.7 | length 49.5
  Top Layer w0.3: U23.1@383.388,400.486 383.388,404.216 v1(383.794,404.622) ; v1(394.208,409.448) 395.224,410.464 421.386,410.464 422.109,411.187 R68.1@422.109,411.937
  Top Layer w0.5: U29.7@421.919,415.255 421.919,412.127 R68.1@422.109,411.937
  MidLayer1 w0.3: v1(383.794,404.622) 386.842,407.67 392.43,407.67 v1(394.208,409.448)
BT_CH_A: U10.3 U22.11 U23.11 | length 33.7
  Top Layer w0.3: U22.11@372.085,407.488 v1(372.085,409.423) ; v1(389.738,409.296) 389.738,406.298 391.033,405.003 U10.3@396.672,405.003
  MidLayer1 w0.3: v1(372.085,409.423) 376.189,405.318 381.188,405.318 385.48,409.61 389.423,409.61 v1(389.738,409.296)
BT_CH_B: U10.2 U22.10 U23.10 | length 32.4
  Top Layer w0.3: U22.10@373.355,407.488 v1(373.355,409.423) ; v1(391.008,409.346) 391.008,406.298 391.668,405.638 394.462,405.638 394.627,405.803 U10.2@396.672,405.803
  MidLayer1 w0.3: v1(373.355,409.423) 376.859,405.918 380.939,405.918 385.485,410.464 389.89,410.464 v1(391.008,409.346)
BT_CH_C: U10.1 U22.9 U23.9 | length 30.9
  Top Layer w0.3: U22.9@374.625,407.488 v1(374.625,409.423) ; v1(392.278,409.346) 392.278,406.552 392.43,406.4 394.208,406.4 394.411,406.603 U10.1@396.672,406.603
  MidLayer1 w0.3: v1(374.625,409.423) 377.529,406.518 380.691,406.518 385.399,411.226 390.398,411.226 v1(392.278,409.346)
BT_CH_CS: U10.7 U22.6 U23.6 | length 31.3
  Top Layer w0.3: U22.6@372.085,400.588 v1(372.11,402.336) ; v1(389.636,402.336) U23.6@389.738,400.486 389.738,398.932 390.052,398.618 392.435,398.618 395.621,401.803 U10.7@396.672,401.803
  MidLayer1 w0.3: v1(372.11,402.336) v1(389.636,402.336) v1@389.636,402.082
BT_CH_I_IN: U10.8 U23.3 | length 14.2
  Top Layer w0.3: U23.3@385.928,400.486 385.928,398.424 386.334,398.018 392.684,398.018 395.669,401.003 U10.8@396.672,401.003
BT_CH_V_IN: U10.9 U22.3 | length 32.8
  Top Layer w0.3: U22.3@368.275,400.588 368.275,397.789 369.062,397.002 392.517,397.002 395.718,400.203 U10.9@396.672,400.203
BV1: R26.2 U22.13 | length 24.9
  Top Layer w0.3: U22.13@369.545,407.488 369.545,405.917 370.31,405.152 375.942,405.152 376.936,406.146 v1(376.936,409.194)
  Bottom Layer w0.3: R26.2@376.885,421.374 v1(376.936,409.194)
BV2: R27.2 U22.14 | length 38.4
  Top Layer w0.3: U22.14@368.275,407.488 368.275,405.917 369.64,404.552 376.358,404.552 377.698,405.892 v1(377.698,408.686)
  Bottom Layer w0.3: v1(377.698,408.686) 377.698,410.972 378.968,412.242 388.874,412.242 389.915,413.283 R27.2@389.915,421.298
BV3: R32.2 U22.15 | length 54.2
  Top Layer w0.3: U22.15@367.005,407.488 367.005,405.663 368.716,403.952 377.028,403.952 378.46,405.384 v1(378.46,408.178)
  Bottom Layer w0.3: v1(378.46,408.178) 378.46,410.718 379.384,411.642 402.219,411.642 403.073,412.496 R32.2@403.073,421.476
BV4: R33.2 U22.12 | length 61.8
  Top Layer w0.3: U22.12@370.815,407.488 370.815,406.171 371.094,405.892 375.666,405.892 375.92,406.146 375.92,409.448 376.59,410.118 378.806,410.118 v1(379.222,409.702)
  Bottom Layer w0.3: v1(379.222,409.702) 380.492,410.972 415.544,410.972 416.306,411.734 416.306,421.044 R33.2@415.696,421.654
BV5: R37.2 U22.1 | length 76.6
  Top Layer w0.3: U22.1@365.735,400.588 365.735,402.819 366.268,403.352 377.444,403.352 379.222,405.13 v1(379.222,407.67)
  Bottom Layer w0.3: v1(379.222,407.67) 379.222,408.432 381,410.21 420.37,410.21 426.72,416.56 426.72,419.862 428.219,421.361 R37.2@428.219,421.73
C_BT1: -BT1.1 R3.1 R39.2 R45.2 | length 54.8
  Top Layer w0.5: R39.2@363.169,414.74 362.7,414.74 361.798,415.643 361.798,426.057 362.788,427.048 R45.2@366.459,427.048
  Top Layer w3: R3.1@370.002,444.424 374.371,448.793 -BT1.1@374.371,451.561 ; -BT1.1@374.447,451.561 -BT1.1@374.447,451.612
  MidLayer1 w0.5: v2(364.744,427.048) 364.744,441.935 -BT1.1@374.371,451.561 ; -BT1.1@374.383,451.548 -BT1.1@374.447,451.612
C_BT2: -BT2.1 R4.1 R41.2 R46.2 | length 54.1
  Top Layer w0.5: R41.2@376.682,414.819 376.391,414.819 375.412,415.798 375.412,425.958 376.657,427.203 R46.2@380.175,427.203
  Top Layer w3: -BT2.1@381.787,457.479 383.794,455.473 R4.1@383.794,453.136
  MidLayer1 w0.5: v2(377.952,427.228) 377.952,445.77 381.787,449.605 -BT2.1@381.787,457.479
C_BT3: -BT3.1 R5.1 R53.2 R59.2 | length 63.5
  Top Layer w0.5: R53.2@390.246,415.327 389.853,415.327 388.874,416.306 388.874,426.466 389.484,427.076 R59.2@393.561,427.076
  Top Layer w3: -BT3.1@389.738,462.204 R5.1@397.256,454.685
  MidLayer1 w0.5: -BT3.1@389.738,462.204 389.738,451.764 391.922,449.58 v2(391.922,427.076)
C_BT4: -BT4.1 R6.1 R55.2 R60.2 | length 68.6
  Top Layer w0.5: R55.2@403.682,415.124 403.01,415.124 402.336,415.798 402.336,426.466 403.276,427.406 R60.2@407.049,427.406
  Top Layer w3: R6.1@411.226,458.191 -BT4.1@417.601,464.566
  MidLayer1 w0.5: v2(405.384,427.406) 405.384,452.349 -BT4.1@417.601,464.566
C_BT5: -BT5.1 R7.1 R67.2 R70.2 | length 59.8
  Top Layer w0.5: R67.2@417.424,415.378 416.726,415.378 416.052,416.052 416.052,426.212 416.814,426.974 R70.2@420.739,426.974
  Top Layer w3: R7.1@424.688,454.406 424.688,456.819 -BT5.1@427.634,459.765
  MidLayer1 w0.5: v2(418.846,426.974) 418.846,450.977 -BT5.1@427.634,459.765
CHRG_PWR_EN: R18.2 R19.2 U10.23 | length 24.6
  Top Layer w0.5: U10.23@409.072,398.603 410.641,398.603 v1(411.734,397.51)
  MidLayer1 w0.5: v1(411.734,397.51) 423.418,397.51 v1(427.99,392.938)
  Bottom Layer w0.5: v1(427.99,392.938) 428.346,392.938 ; R18.2@428.346,394.349 428.346,392.672 R19.2@429.274,391.744
DIO_SCL: R9.2 U9.14 U10.22 | length 13.8
  Top Layer w0.3: U10.22@406.872,396.603 406.872,395.768 v1(407.238,395.402) U9.14@415.29,395.402
  Top Layer w0.5: v1(406.769,392.569) R9.2@408.153,392.569
  Bottom Layer w0.3: v1(406.769,392.569) 406.769,394.933 v1(407.238,395.402)
DIO_SDA: R8.2 U9.15 U10.21 | length 12.8
  Top Layer w0.3: U10.21@406.072,396.603 406.072,394.79 406.73,394.132 U9.15@415.29,394.132 ; R8.2@410.261,392.569 410.261,394.081